# Altium PCB IPA-Safety-Relay-PCB.PcbDoc
Units mm, origin at the board's own origin, x right, y up, seen from the top; angles counter-clockwise.
Board outline 153.99 x 88.58 mm, 2 copper layers (Top Layer, Bottom Layer); 12 components, 37 nets, 133 pads, 13 vias.
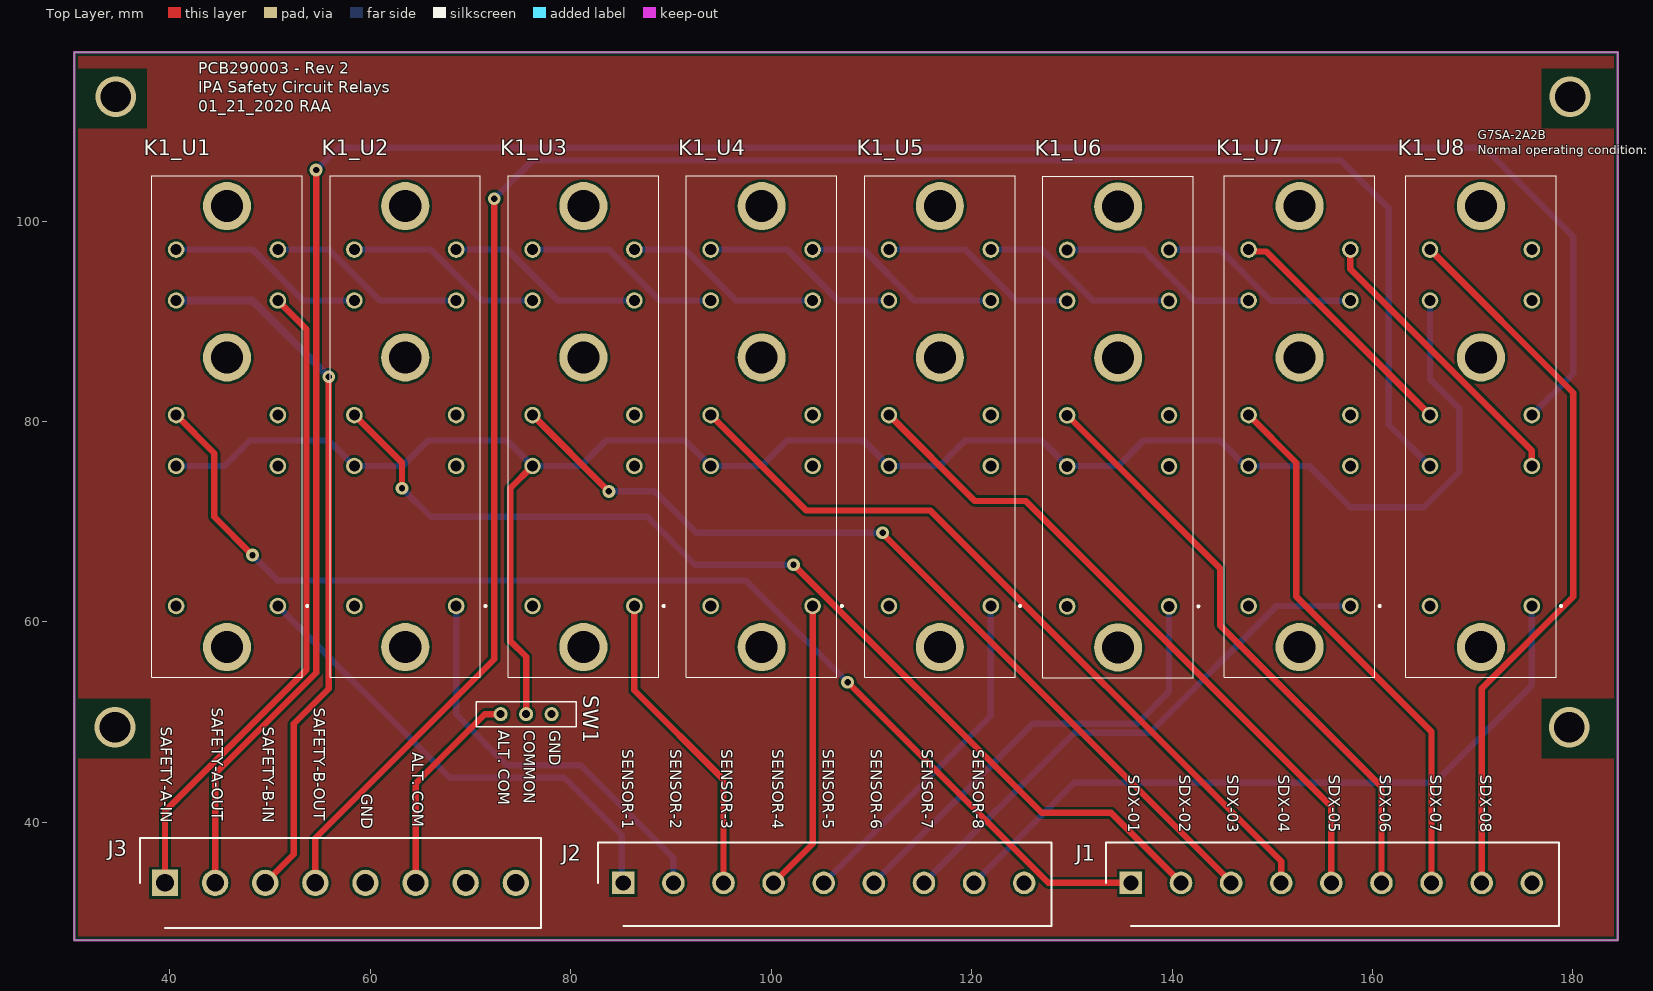
[diagram p0: Top Layer view]
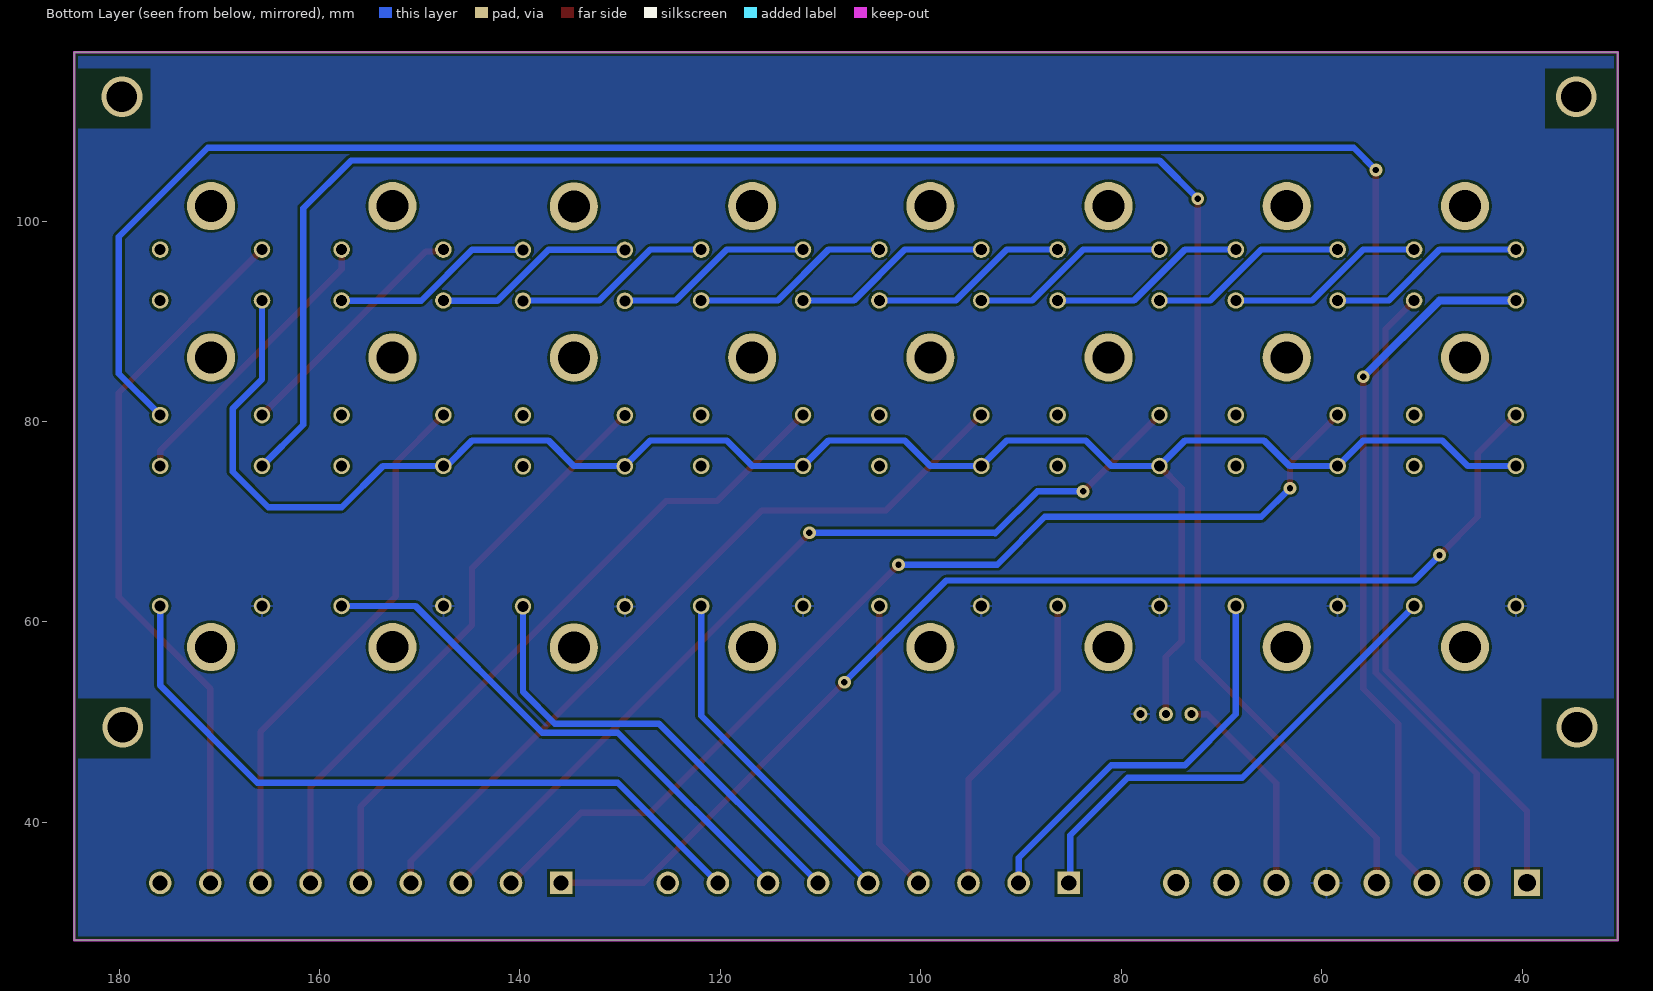
[diagram p1: Bottom Layer view, seen from below]
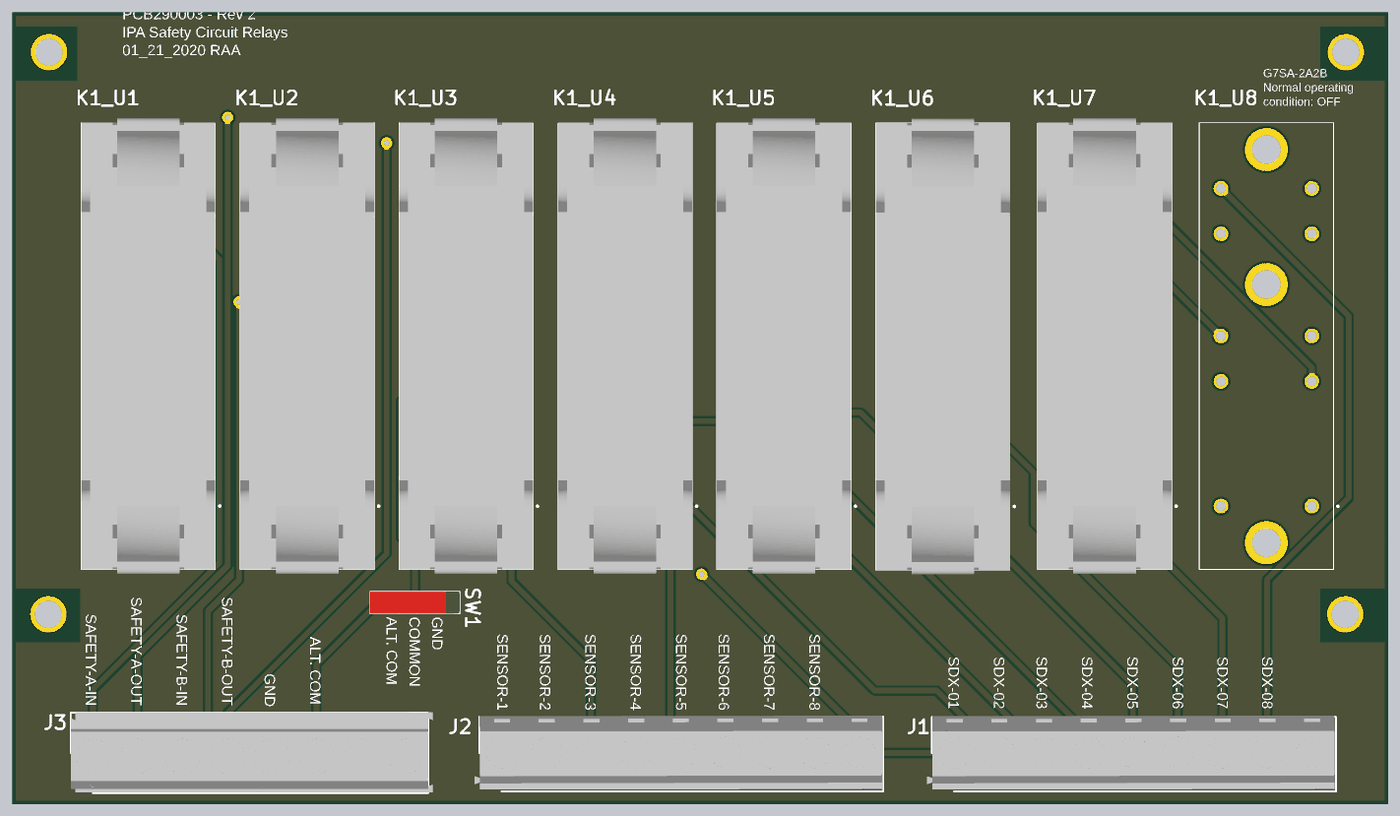
[diagram p2: 3D render of the assembled board from above, using the file's embedded part models]

## Layer stack, top to bottom
Top Solder: solder mask 0.0102, Solder Resist, Dk 3.5
Top Layer: signal copper 0.0356
Dielectric 1: dielectric 0.32, FR-4, Dk 4.8
Bottom Layer: signal copper 0.0356
Bottom Solder: solder mask 0.0102, Solder Resist, Dk 3.5

## Board outline
30.48,116.84 184.468,116.84 184.468,28.258 30.48,28.258

## Design rules (kind name [scope] priority, off if disabled: settings)
Clearance [All] p1: gap=0.254 ignorepadtopadclearanceinfootprint=FALSE except(0: Arc-Hole Track-Hole SMDPad-Hole THPad-Hole Via-Hole Fill-Hole Poly-Hole Region-Hole Text-Hole)
PolygonConnect [All] p1: connectstyle=Relief reliefconductorwidth=0.254 reliefentries=4 polygonreliefangle="90 Angle" airgapwidth=0.254
RoutingVias [All] p1: holewidth=0.635 width=1.27 viastyle="Through Hole" minholewidth=0.254 minwidth=1.016 maxholewidth=1.27 maxwidth=2.54
SolderMaskExpansion [All] p1: expansion=0.102
Width [All] p1: maxlimit=3.81 minlimit=0.254 preferedwidth=0.635 minimp=50.000000 maximp=50.000000 favimp=50.000000
30 further rules are at their usual default settings.

## Classes and differential pairs
channel class IPA-Safety-Relay-SubSch: U1 U2 U3 U4 U5 U6 U7
component class U8: K1_U8
component class U7: K1_U7
component class U6: K1_U8
component class U5: K1_U5
component class U4: K1_U4
component class U3: K1_U3
component class U2: K1_U2
component class U1: K1_U1
component class IPA-Safety-Relay-Schematic: J1 J2 J3 SW1

## Components (designator, comment, footprint, x,y, rotation, side; value= is the part's Value field where it differs from the comment)
J1 "282836-9" SHDR9W130P0X500_1X9_4500X820X1020P 135.892,33.972 r0 top
J2 "282836-9" SHDR9W130P0X500_1X9_4500X820X1020P 85.252,33.972 r0 top
J3 "796683-8" SHDR8W110P0X500_1X8_4000X900X1520P 39.532,33.972 r0 top
K1_U1 "P7SA-10P_(G7SA-3A1B)" P7SA10PG7SA2A2B 45.72,79.495 r90 top (schematic designator K1)
K1_U2 "P7SA-10P_(G7SA-3A1B)" P7SA10PG7SA2A2B 63.5,79.495 r90 top (schematic designator K1)
K1_U3 "P7SA-10P_(G7SA-3A1B)" P7SA10PG7SA2A2B 81.28,79.495 r90 top (schematic designator K1)
K1_U4 "P7SA-10P_(G7SA-3A1B)" P7SA10PG7SA2A2B 99.06,79.495 r90 top (schematic designator K1)
K1_U5 "P7SA-10P_(G7SA-3A1B)" P7SA10PG7SA2A2B 116.84,79.495 r90 top (schematic designator K1)
K1_U6 "P7SA-10P_(G7SA-3A1B)" P7SA10PG7SA2A2B 134.62,79.46 r90 top (schematic designator K1)
K1_U7 "P7SA-10P_(G7SA-3A1B)" P7SA10PG7SA2A2B 152.718,79.495 r90 top (schematic designator K1)
K1_U8 "P7SA-10P_(G7SA-2A2B)" P7SA10PG7SA2A2B 170.815,79.495 r90 top (schematic designator K?)
SW1 "450301014042" 450301014042 75.565,50.8 r0 top

## Footprints (in the part's own frame and the unit in brackets; to place one, negate y for a bottom-side part, rotate by r counter-clockwise, add the part's x,y. Pads: shape width x height; smd on the part's side, far side on the other; paste and mask are expansions set on the pad)
450301014042 [mm] "10mm*2.5mm. SPDT, ON-ON, 2.54mm, horizontal type, THT, bulk"
  round 1.4 hole 0.8: 1(0,0) 2(-2.54,0) 3(2.54,0)
  silkscreen extent -5,-1.25 5,1.25, body extent -5,-1.25 5,1.25, height 6.4
P7SA10PG7SA2A2B [mm]
  round 1.65 hole 1.1: 1(-17.9,-5.08) 2(-3.93,-5.08) 3(1.15,-5.08) 4(12.58,-5.08) 5(17.66,-5.08) 6(17.66,5.08) 7(12.58,5.08) 8(1.15,5.08) 9(-3.93,5.08) 10(-17.9,5.08)
  round 4.8 hole 3.2: MH1(-22,0) MH2(6.9,0) MH3(22,0)
  silkscreen extent -25,-8.1 25,7.5, body extent -25.5,-7.5 25.51,7.5, height 40.71
SHDR8W110P0X500_1X8_4000X900X1520P [mm]
  rect 2.625x2.625 hole 1.75: 1(0,0)
  round 2.625 hole 1.75: 2(5,0) 3(10,0) 4(15,0) 5(20,0) 6(25,0) 7(30,0) 8(35,0)
  silkscreen extent -2.5,-4.5 37.5,4.5, body extent -2.47,-4.43 38.03,4.57, height 15.01
SHDR9W130P0X500_1X9_4500X820X1020P [mm]
  rect 2.25x2.25 hole 1.5: 1(0,0)
  round 2.25 hole 1.5: 2(5,0) 3(10,0) 4(15,0) 5(20,0) 6(25,0) 7(30,0) 8(35,0) 9(40,0)
  silkscreen extent -2.5,-4.3 42.7,4.05, body extent -3.05,-4.1 42.56,4.17, height 10

## Part data
J1 J2: "Connector", Manufacturer_Name="TE Connectivity", Mouser Part Number=571-282836-9, RS Part Number=3617746, Allied_Number=70285523, Allied Price/Stock=https://www.alliedelec.com/te-connectivity-282836-9/70285523/, Datasheet Link=http://www.te.com/commerce/DocumentDelivery/DDEController?Action=srchrtrv&DocNm=282836&DocType=Customer+Drawing&DocLang=English, Height=10.2mm, Manufacturer_Part_Number=282836-9, Mouser Price/Stock=https://www.mouser.com/Search/Refine.aspx?Keyword=571-282836-9, RS Price/Stock=http://uk.rs-online.com/web/p/products/3617746
J3: "Connector", Manufacturer_Name="TE Connectivity", Mouser Part Number=571-796683-8, Datasheet Link=http://www.te.com/commerce/DocumentDelivery/DDEController?Action=srchrtrv&DocNm=796683&DocType=Customer+Drawing&DocLang=English, Height=15.2mm, Manufacturer_Part_Number=796683-8, Mouser Price/Stock=https://www.mouser.com/Search/Refine.aspx?Keyword=571-796683-8
K1_U1 K1_U2 K1_U3 K1_U4 K1_U5 K1_U6 K1_U7: "Relay or Contactor", Manufacturer_Name="Omron Electronics", Manufacturer_Part_Number="P7SA-10P (G7SA-3A1B)", Mouser Part Number=653-P7SA-10P, Allied_Number=70033653, Allied Price/Stock=https://www.alliedelec.com/omron-safety-sti-p7sa-10p/70033653/, Datasheet Link=http://www.ia.omron.com/data_pdf/cat/g7sa_j120-e1_12_1_csm1269.pdf, Mouser Price/Stock=https://www.mouser.com/Search/Refine.aspx?Keyword=653-P7SA-10P
K1_U8: "Relay or Contactor", Manufacturer_Name="Omron Electronics", Manufacturer_Part_Number="P7SA-10P (G7SA-2A2B)", Datasheet Link=http://www.ia.omron.com/data_pdf/cat/g7sa_j120-e1_12_1_csm1269.pdf
SW1: library part CMP-1466-00001-1, "WS-SLTV 10mm*2.5mm, SPDT, ON-ON, 2.54mm, straight type, THT, Mini Slide Switch, 3 pins", Manufacturer="Wuerth Elektronik", ComponentLink1Description="Manufacturer URL", ComponentLink1URL=http://www.we-online.com, ComponentLink2Description=Datasheet, ComponentLink2URL=http://katalog.we-online.de/em/datasheet/450301014042.pdf, NoPins=06, PackageReference=450301014042, PartNumber=450301014042

## Via types
v1: diameter 1.27, hole 0.635, Top Layer to Bottom Layer, 9 vias
v2: diameter 4.064, hole 3.048, Top Layer to Bottom Layer, 4 vias

## Nets (pads, with @x,y where several pads share a name; then routed paths per layer and width w, separated by ;. In a path a pad name is that pad's centre, name@x,y a point inside that pad or via, vN(x,y) a via of type N, cw(c..) or ccw(c..) an arc to the next point about the centre after c; other vN are vias at no path point)
COM-IN: J3.6 SW1.2 | length 21.3
  Top Layer w0.635: J3.6 64.532,43.895 71.438,50.8 SW1.2
COMMON: K1_U1.9 K1_U2.9 K1_U3.9 K1_U4.9 K1_U5.9 K1_U6.9 K1_U7.9 K1_U8.7 SW1.1 | length 188.1
  Top Layer w0.635: SW1.1 75.565,56.515 73.977,58.102 73.977,73.343 K1_U3.9
  Bottom Layer w0.635: K1_U1.9 45.448,75.565 47.988,78.105 55.88,78.105 K1_U2.9 63.228,75.565 65.768,78.105 73.66,78.105 K1_U3.9 81.008,75.565 83.548,78.105 91.44,78.105 K1_U4.9 99.06,75.565 101.6,78.105 109.22,78.105 K1_U5.9 116.84,75.565 119.38,78.105 127,78.105 129.54,75.565 134.62,75.565 137.16,78.105 144.78,78.105 K1_U7.9@147.32,75.565 ; K1_U7.9 153.67,75.565 157.797,71.438 165.1,71.438 168.647,74.984 168.647,81.301 165.735,84.213 K1_U8.7
GND: J3.5 K1_U1.10 K1_U2.10 K1_U3.10 K1_U4.10 K1_U5.10 K1_U6.10 K1_U7.10 K1_U8.10 SW1.3
NetK1_U1_5: K1_U1.5 K1_U2.4 | length 19.9
  Bottom Layer w0.635: K1_U1.5 55.88,97.155 60.96,92.075 K1_U2.4
NetK1_U1_6: K1_U1.6 K1_U2.7 | length 19.9
  Bottom Layer w0.635: K1_U1.6 48.26,97.155 53.34,92.075 K1_U2.7
NetK1_U2_5: K1_U2.5 K1_U3.4 | length 19.9
  Bottom Layer w0.635: K1_U2.5 73.66,97.155 78.74,92.075 K1_U3.4
NetK1_U2_6: K1_U2.6 K1_U3.7 | length 19.9
  Bottom Layer w0.635: K1_U2.6 66.04,97.155 71.12,92.075 K1_U3.7
NetK1_U3_5: K1_U3.5 K1_U4.4 | length 19.9
  Bottom Layer w0.635: K1_U3.5 91.44,97.155 96.52,92.075 K1_U4.4
NetK1_U3_6: K1_U3.6 K1_U4.7 | length 19.9
  Bottom Layer w0.635: K1_U3.6 83.82,97.155 88.9,92.075 K1_U4.7
NetK1_U4_5: K1_U4.5 K1_U5.4 | length 19.9
  Bottom Layer w0.635: K1_U4.5 109.22,97.155 114.3,92.075 K1_U5.4
NetK1_U4_6: K1_U4.6 K1_U5.7 | length 19.9
  Bottom Layer w0.635: K1_U4.6 101.6,97.155 106.68,92.075 K1_U5.7
NetK1_U5_5: K1_U5.5 K1_U6.4 | length 19.9
  Bottom Layer w0.635: K1_U5.5 127,97.155 132.08,92.075 K1_U6.4@139.7,92.075
NetK1_U5_6: K1_U5.6 K1_U6.7 | length 19.9
  Bottom Layer w0.635: K1_U5.6 119.38,97.155 124.46,92.075 K1_U6.7@129.54,92.075
NetK1_U6_5: K1_U6.5 K1_U7.4 | length 19.9
  Bottom Layer w0.635: K1_U6.5 144.78,97.12 149.86,92.04 K1_U7.4@157.48,92.04
NetK1_U6_6: K1_U6.6 K1_U7.7 | length 19.9
  Bottom Layer w0.635: K1_U6.6 137.16,97.12 142.24,92.04 K1_U7.7@147.32,92.04
NetK1_U7_5: K1_U7.5 K1_U8.2 | length 29.1
  Top Layer w0.635: K1_U7.5 157.797,95.21 175.895,77.113 K1_U8.2
NetK1_U7_6: K1_U7.6 K1_U8.8 | length 24.9
  Top Layer w0.635: K1_U7.6 147.827,96.965 149.415,96.965 K1_U8.8
SAFETY-A-IN: J3.1 K1_U1.4 | length 65.1
  Top Layer w0.635: J3.1 39.532,41.12 53.657,55.245 53.657,89.218 K1_U1.4
SAFETY-A-OUT: J3.2 K1_U8.3 | length 224.8
  Top Layer w0.635: J3.2 44.532,44.85 54.61,54.927 54.61,102.87 v1(54.61,105.093)
  Bottom Layer w0.635: v1(54.61,105.093) 56.832,107.315 171.132,107.315 180.022,98.425 180.022,84.772 K1_U8.3
SAFETY-B-IN: J3.3 K1_U1.7 | length 71.5
  Top Layer w0.635: J3.3 52.387,36.828 52.387,49.847 55.88,53.34 v1(55.88,84.455)
  Bottom Layer w0.762: K1_U1.7 48.26,92.075 v1(55.88,84.455)
SAFETY-B-OUT: J3.4 K1_U8.9 | length 195.9
  Top Layer w0.635: J3.4 54.532,38.414 72.39,56.272 v1(72.39,102.235)
  Bottom Layer w0.635: v1(72.39,102.235) 76.2,106.045 156.845,106.045 161.607,101.282 161.607,79.692 K1_U8.9
SDX-O1: J1.1 K1_U1.8 | length 118.3
  Top Layer w0.635: K1_U1.8 44.45,76.835 44.45,70.485 v1(48.26,66.675) ; v1(107.632,53.975) 107.649,53.975 127.652,33.972 J1.1
  Bottom Layer w0.635: v1(48.26,66.675) 50.8,64.135 97.472,64.135 v1(107.632,53.975)
SDX-O2: J1.2 K1_U2.8 | length 103.3
  Top Layer w0.635: K1_U2.8 63.182,75.882 v1(63.182,73.343) ; v1(102.235,65.722) 127,40.957 133.907,40.957 J1.2
  Bottom Layer w0.635: v1(63.182,73.343) 66.04,70.485 87.63,70.485 92.392,65.722 v1(102.235,65.722)
SDX-O3: J1.3 K1_U3.8 | length 89
  Top Layer w0.635: K1_U3.8 v1(83.82,73.025) ; v1(111.125,68.897) 111.125,68.819 145.892,34.051 J1.3
  Bottom Layer w0.635: v1(83.82,73.025) 88.402,73.025 92.584,68.843 ; 92.71,68.897 v1(111.125,68.897)
SDX-O4: J1.4 K1_U4.8 | length 77.5
  Top Layer w0.635: K1_U4.8 103.505,71.12 115.887,71.12 150.892,36.115 J1.4
SDX-O5: J1.5 K1_U5.8 | length 67.9
  Top Layer w0.635: K1_U5.8 120.332,72.072 125.412,72.072 155.892,41.593 J1.5
SDX-O6: J1.6 K1_U6.8 | length 59.6
  Top Layer w0.635: K1_U6.8 144.78,65.37 144.78,59.69 160.893,43.577 J1.6
SDX-O7: J1.7 K1_U7.8 | length 54.2
  Top Layer w0.635: K1_U7.8 152.4,75.882 152.4,62.547 165.893,49.055 J1.7
SDX-O8: J1.8 K1_U8.6 | length 72.9
  Top Layer w0.635: K1_U8.6 180.022,82.867 180.022,62.5 170.893,53.37 J1.8
SENSOR-1: J2.1 K1_U1.1 | length 48.6
  Bottom Layer w0.635: K1_U1.1 67.945,44.45 79.38,44.45 85.09,38.74 85.09,34.135 J2.1
SENSOR-2: J2.2 K1_U2.1 | length 40.9
  Bottom Layer w0.635: K1_U2.1 68.58,50.8 73.66,45.72 81.018,45.72 90.252,36.486 J2.2
SENSOR-3: J2.3 K1_U3.1 | length 31.3
  Top Layer w0.635: K1_U3.1 86.36,53.185 95.252,44.293 J2.3
SENSOR-4: J2.4 K1_U4.1 | length 29.2
  Top Layer w0.635: J2.4 104.14,37.86 K1_U4.1
SENSOR-5: J2.5 K1_U5.1 | length 34.5
  Bottom Layer w0.635: J2.5 121.92,50.64 K1_U5.1
SENSOR-6: J2.6 K1_U6.1 | length 45.9
  Bottom Layer w0.635: J2.6 126.127,49.847 136.525,49.847 139.7,53.023 K1_U6.1
SENSOR-7: J2.7 K1_U7.1 | length 54
  Bottom Layer w0.635: J2.7 130.238,48.959 137.781,48.959 150.417,61.595 K1_U7.1
SENSOR-8: J2.8 K1_U8.1 | length 71.7
  Bottom Layer w0.635: J2.8 130.25,43.97 166.207,43.97 175.895,53.657 K1_U8.1
pads on no net: J1.9 J2.9 J3.7 J3.8 K1_U1.2 K1_U1.3 K1_U1.MH1 K1_U1.MH2 K1_U1.MH3 K1_U2.2 K1_U2.3 K1_U2.MH1 K1_U2.MH2 K1_U2.MH3 K1_U3.2 K1_U3.3 K1_U3.MH1 K1_U3.MH2 K1_U3.MH3 K1_U4.2 K1_U4.3 K1_U4.MH1 K1_U4.MH2 K1_U4.MH3 K1_U5.2 K1_U5.3 K1_U5.MH1 K1_U5.MH2 K1_U5.MH3 K1_U6.2 K1_U6.3 K1_U6.MH1 K1_U6.MH2 K1_U6.MH3 K1_U7.2 K1_U7.3 K1_U7.MH1 K1_U7.MH2 K1_U7.MH3 K1_U8.4 K1_U8.5 K1_U8.MH1 K1_U8.MH2 K1_U8.MH3
copper on no net:
  other v2: 34.544,49.49 179.641,49.49 34.612,112.395 179.709,112.395

## Polygon pours and split planes (outlines as drawn)
GND on Bottom Layer "Bottom Layer-GND" (solid, pour order 2): 30.48,116.84 184.468,116.84 184.468,28.258 30.48,28.258
no net on Top Layer "Top Layer-+24VDC" (solid, pour order 0): 184.468,28.258 184.468,116.84 30.48,116.84 30.48,28.258

## Keep-outs
Top Layer:
  region: 132.715,116.84
Keep-Out Layer:
  the board outline again, w0.254

## Other copper
Top Layer:
  pour cut-out: 30.48,109.22 37.782,109.22 37.782,115.252 30.48,115.252
  pour cut-out: 30.48,46.355 37.782,46.355 37.782,52.387 30.48,52.387
  pour cut-out: 176.847,46.355 184.468,46.355 184.468,52.387 176.847,52.387
  pour cut-out: 176.847,109.22 184.468,109.22 184.468,115.252 176.847,115.252
  pour cut-out: 38.1,46.038
Bottom Layer:
  pour cut-out: 30.48,109.22 37.782,109.22 37.782,115.252 30.48,115.252
  pour cut-out: 30.48,46.355 37.782,46.355 37.782,52.387 30.48,52.387
  pour cut-out: 176.847,46.355 184.468,46.355 184.468,52.387 176.847,52.387
  pour cut-out: 176.847,109.22 184.468,109.22 184.468,115.252 176.847,115.252

## Silkscreen, mask and mechanical layers (free items; w line width, h text height)
Top Overlay:
  text "PCB290003 - Rev 2 / IPA Safety Circuit Relays / 01_21_2020 RAA" at 42.862,110.49 h1.91
  text "G7SA-2A2B / Normal operating condition: OFF" at 170.498,106.362 h1.5
  text "SAFETY-A-OUT" at 43.815,51.435 h1.91 r270
  text "SAFETY-B-OUT" at 53.975,51.435 h1.91 r270
  text "SAFETY-A-IN" at 38.735,49.53 h1.91 r270
  text "SAFETY-B-IN" at 48.895,49.53 h1.91 r270
  text "ALT. COM" at 72.39,49.212 h1.91 r270
  text "COMMON" at 74.93,49.212 h1.91 r270
  text "GND" at 77.47,49.212 h1.91 r270
  text "SENSOR-1" at 84.772,47.307 h1.91 r270
  text "SENSOR-2" at 89.535,47.307 h1.91 r270
  text "SENSOR-3" at 94.615,47.307 h1.91 r270
  text "SENSOR-4" at 99.695,47.307 h1.91 r270
  text "SENSOR-5" at 104.775,47.307 h1.91 r270
  text "SENSOR-6" at 109.537,47.307 h1.91 r270
  text "SENSOR-7" at 114.617,47.307 h1.91 r270
  text "SENSOR-8" at 119.697,47.307 h1.91 r270
  text "ALT. COM" at 63.817,46.99 h1.91 r270
  text "SDX-01" at 135.255,44.767 h1.91 r270
  text "SDX-02" at 140.335,44.767 h1.91 r270
  text "SDX-03" at 145.097,44.767 h1.91 r270
  text "SDX-04" at 150.177,44.767 h1.91 r270
  text "SDX-05" at 155.257,44.767 h1.91 r270
  text "SDX-06" at 160.338,44.767 h1.91 r270
  text "SDX-07" at 165.338,44.767 h1.91 r270
  text "SDX-08" at 170.338,44.767 h1.91 r270
  text "GND" at 58.737,42.862 h1.91 r270